# EAGLE board sbc_smps_4_layer_v0001 (EAGLE 6.4)
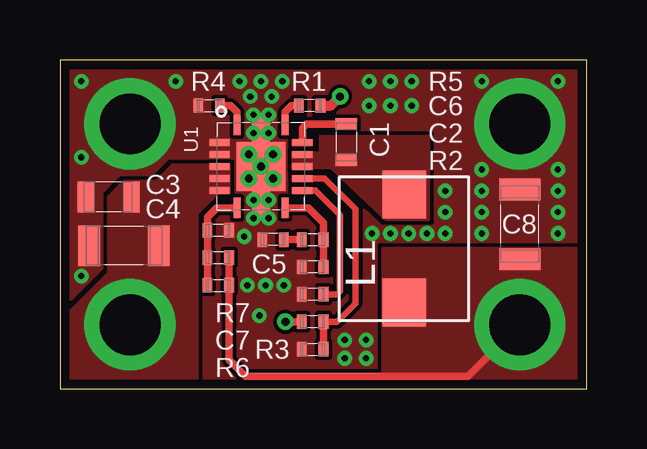
[diagram p0: board, top side]
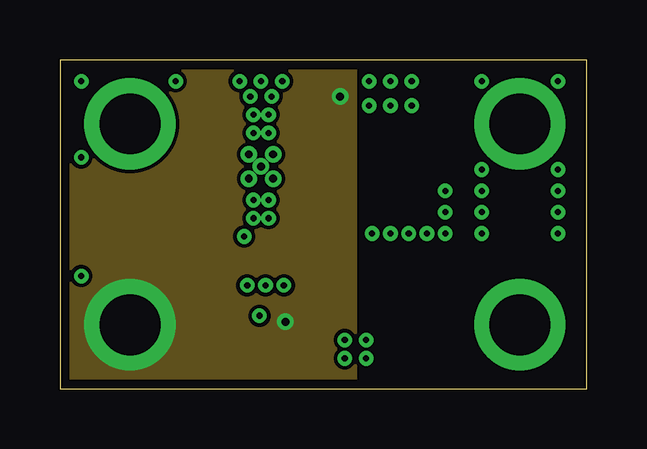
[diagram p1: board, inner layer Route2]
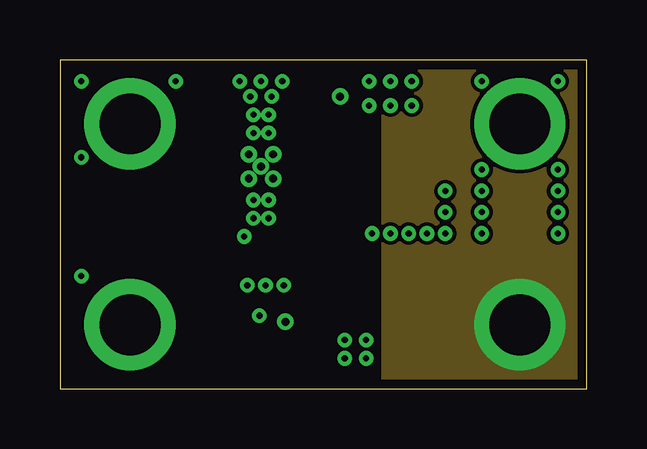
[diagram p2: board, inner layer Route3]
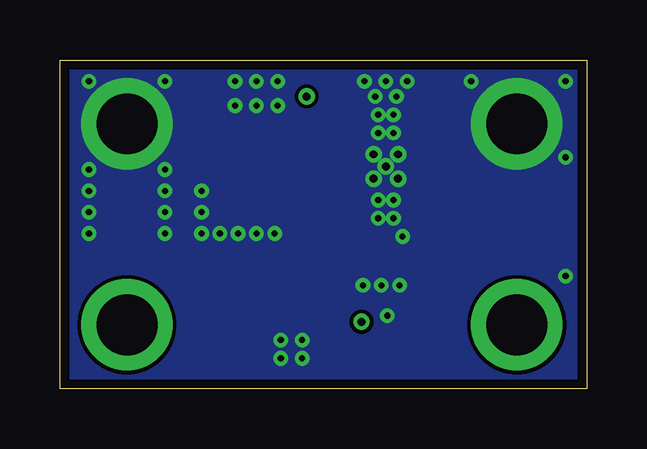
[diagram p3: board, bottom side, seen from below]

Size 21.97 x 13.72 mm. Coordinates in mm from the lower left corner, seen from the top.
Outline: 0,0 21.97,0 21.97,13.72 0,13.72 0,0
Copper layers (1*2*3*16): Top 0.035mm / dielectric 1.5mm / Route2 0.035mm / dielectric 0.15mm / Route3 0.035mm / dielectric 0.2mm / Bottom 0.035mm
Design rules "default *": minimum track width 5mil, minimum drill 13mil, track to track 6mil, track to pad 6mil, pad to pad 6mil, via to via 6mil, smd to smd 6mil, copper to edge 15mil, drill to drill 8mil, minimum pad ring 7mil, minimum via ring 7mil, stop-mask expansion 4mil, vias tented up to drill 16mil, thermal gap 10mil

## Footprints (pad centres in the part's own frame; a part is rotated, then mirrored left to right if it is on the bottom)
0603L3 = smd 0.5 x 0.9: P$1 -0.75,0; P$2 0.75,0
0402L3 = smd 0.4 x 0.6: P$1 -0.45,0; P$2 0.45,0
0805L3 = smd 0.7 x 1.3: 1 -0.95,0; 2 0.95,0
1206L3 = smd 0.9 x 1.7: 1 -1.45,0; 2 1.45,0
5.7X5.2 = smd 2 x 1.8: 1 -2.25,0; 2 2.25,0
VQFN-14 = smd 0.85 x 0.28: 1 -1.725,-1; 7 1.725,-1; 8 1.725,1; 14 -1.725,1 | smd 0.28 x 0.85: 2 -1,-1.725; 3 -0.5,-1.725; 4 0,-1.725; 5 0.5,-1.725; 6 1,-1.725; 9 1,1.725; 10 0.5,1.725; 11 0,1.725; 12 -0.5,1.725; 13 -1,1.725 | smd 2.05 x 2.05: TP@1 0,0 | smd 1.125 x 0.75: TP@2 -1.587,0; TP@3 1.587,0

## Placement (x,y rotation side)
C1  100n  [0603L3]  11.94,10.29 270 top
C2  1.8n  [0402L3]  10.54,3.94 180 top
C3  4.7u  [0805L3]  2.03,8 180 top
C4  10u  [1206L3]  2.67,5.97 180 top
C5  33n  [0402L3]  8.89,6.22 180 top
C6  100p  [0402L3]  10.54,5.08 180 top
C7  390p  [0402L3]  6.6,5.46 180 top
C8  22u  [1206L3]  19.18,6.86 90 top
L1  2.2uH  [5.7X5.2]  14.35,5.84 90 top
R1  49.9K  [0402L3]  10.41,11.81 180 top
R2  23.7K  [0402L3]  10.54,2.79 180 top
R3  8.66K  [0402L3]  10.54,1.65 0 top
R4  28.7K  [0402L3]  6.22,11.81 0 top
R5  1.1K  [0402L3]  10.54,6.22 0 top
R6  16.2K  [0402L3]  6.6,4.32 0 top
R7  2.21K  [0402L3]  6.6,6.6 180 top
U1  [VQFN-14]  8.38,9.27 270 top

## Library data of the parts
C1-C8 L1 R1-R7 U1 = common

## Nets
GND: C2.P$2 C3.2 C4.2 C5.P$2 C6.P$2 C8.2 R3.P$1 R4.P$1 R7.P$1 U1.2 U1.3 U1.TP@1 U1.TP@2 U1.TP@3
N$1: C1.P$1 U1.13
N$2: C1.P$2 L1.2 U1.11 U1.12
N$4: R1.P$2 U1.14
N$6: R2.P$1 R3.P$2 U1.10
N$7: C2.P$1 U1.9
N$8: R4.P$2 U1.1
N$9: C6.P$1 R5.P$2 U1.8
N$10: C5.P$1 R5.P$1
N$11: C7.P$2 R6.P$1 R7.P$2 U1.7
VIN: C3.1 C4.1 R1.P$1 R2.P$2 U1.4 U1.5 U1.6
VOUT: C7.P$1 C8.1 L1.1 R6.P$2

## Tracks (layer width: path | path; a pad name or v marks a point on that pad's centre or on a via)
GND  (via drill 0.25, 0.33, 2.54 pad 3.81)
  other vias: 8.38,9.27 7.87,9.78 7.87,8.76 8.89,8.76 8.89,9.78 2.92,11.05 19.18,11.05 0.89,12.83 0.89,9.65 4.83,12.83 7.49,12.83 8.38,12.83 9.27,12.83 7.94,12.19 8.83,12.19 8.06,11.43 8.7,11.43 8.06,10.67 8.7,10.67 8.06,7.87 8.7,7.87 8.06,7.11 8.7,7.11 7.68,6.35 8.57,4.32 7.81,4.32 9.33,4.32 8.32,3.05 11.87,2.03 12.76,2.03 11.87,1.27 12.76,1.27 13.02,6.48 13.78,6.48 14.54,6.48 15.3,6.48 16.07,6.48 16.07,7.37 16.07,8.25 17.59,8.25 17.59,7.37 17.59,6.48 20.76,8.25 20.76,7.37 20.76,6.48 20.76,9.14 17.59,9.14 20.76,12.83 17.59,12.83 14.67,12.83 13.78,12.83 12.89,12.83 12.89,11.81 13.78,11.81 14.67,11.81 0.89,4.7
  pour Top (rank 6, no thermals): 0.38,13.33 21.59,13.33 21.59,0.38 0.38,0.38
  pour Bottom (rank 6, no thermals): 0.38,13.33 21.59,13.33 21.59,0.38 0.38,0.38
N$1
  Top 0.305: U1.13 10.11,10.87 10.29,11.05 11.93,11.05 C1.P$1
N$2
  pour Top (no thermals): 9.72,9.84 10.86,9.84 10.86,10.54 15.37,10.54 15.37,7.05 13.59,7.05 11.3,9.21 9.72,9.21
N$4
  Top 0.305: U1.14 9.38,11.54 9.65,11.81 R1.P$2
N$6
  Top 0.279: U1.10 11.04,8.77 12.32,7.49 12.32,3.56 11.56,2.79 R2.P$1
  Top 0.305: R2.P$1 R3.P$2
N$7
  Top 0.279: U1.9 10.65,8.27 11.68,7.24 11.68,4.06 11.56,3.94 C2.P$1
N$8
  Top 0.305: U1.1 7.38,11.54 7.11,11.81 R4.P$2
N$9
  Top 0.305: C6.P$1 R5.P$2 10.99,6.92 10.36,7.55 U1.8
N$10
  Top 0.305: C5.P$1 R5.P$1
N$11
  Top 0.305: R6.P$1 C7.P$2 R7.P$2 6.15,7.17 6.53,7.55 U1.7
VIN  (via drill 0.33, 2.54 pad 3.81)
  Top 0.305: R2.P$2 v9.4,2.79
  Top 0.406: R1.P$1 11.3,11.81 v11.68,12.19
  other vias: 2.92,2.67
  pour Route2: 0.38,13.33 12.32,13.33 12.32,0.38 0.38,0.38
  pour Top (no thermals): 0.38,0.38 0.38,3.17 2.03,4.83 2.03,8 2.54,8.51 2.67,8.64 4,8.64 4.7,9.33 7.05,9.33 7.05,8.19 6.6,8.19 5.72,7.3 5.72,0.38
VOUT  (via drill 2.54 pad 3.81)
  Top 0.305: C7.P$1 R6.P$2 7.05,1.2 7.75,0.51 17.02,0.51 v19.18,2.67
  pour Route3: 13.46,13.33 21.59,13.33 21.59,0.38 13.46,0.38
  pour Top (no thermals): 13.46,5.84 21.59,5.84 21.59,0.38 13.46,0.38